# Altium PCB hexbot_LED.PcbDoc
Units mil, origin at the board's own origin, x right, y up, seen from the top; angles counter-clockwise.
Board outline 3150.15 x 2730 mil, 2 copper layers (Top Layer, Bottom Layer); 27 components, 22 nets, 102 pads, 15 vias.
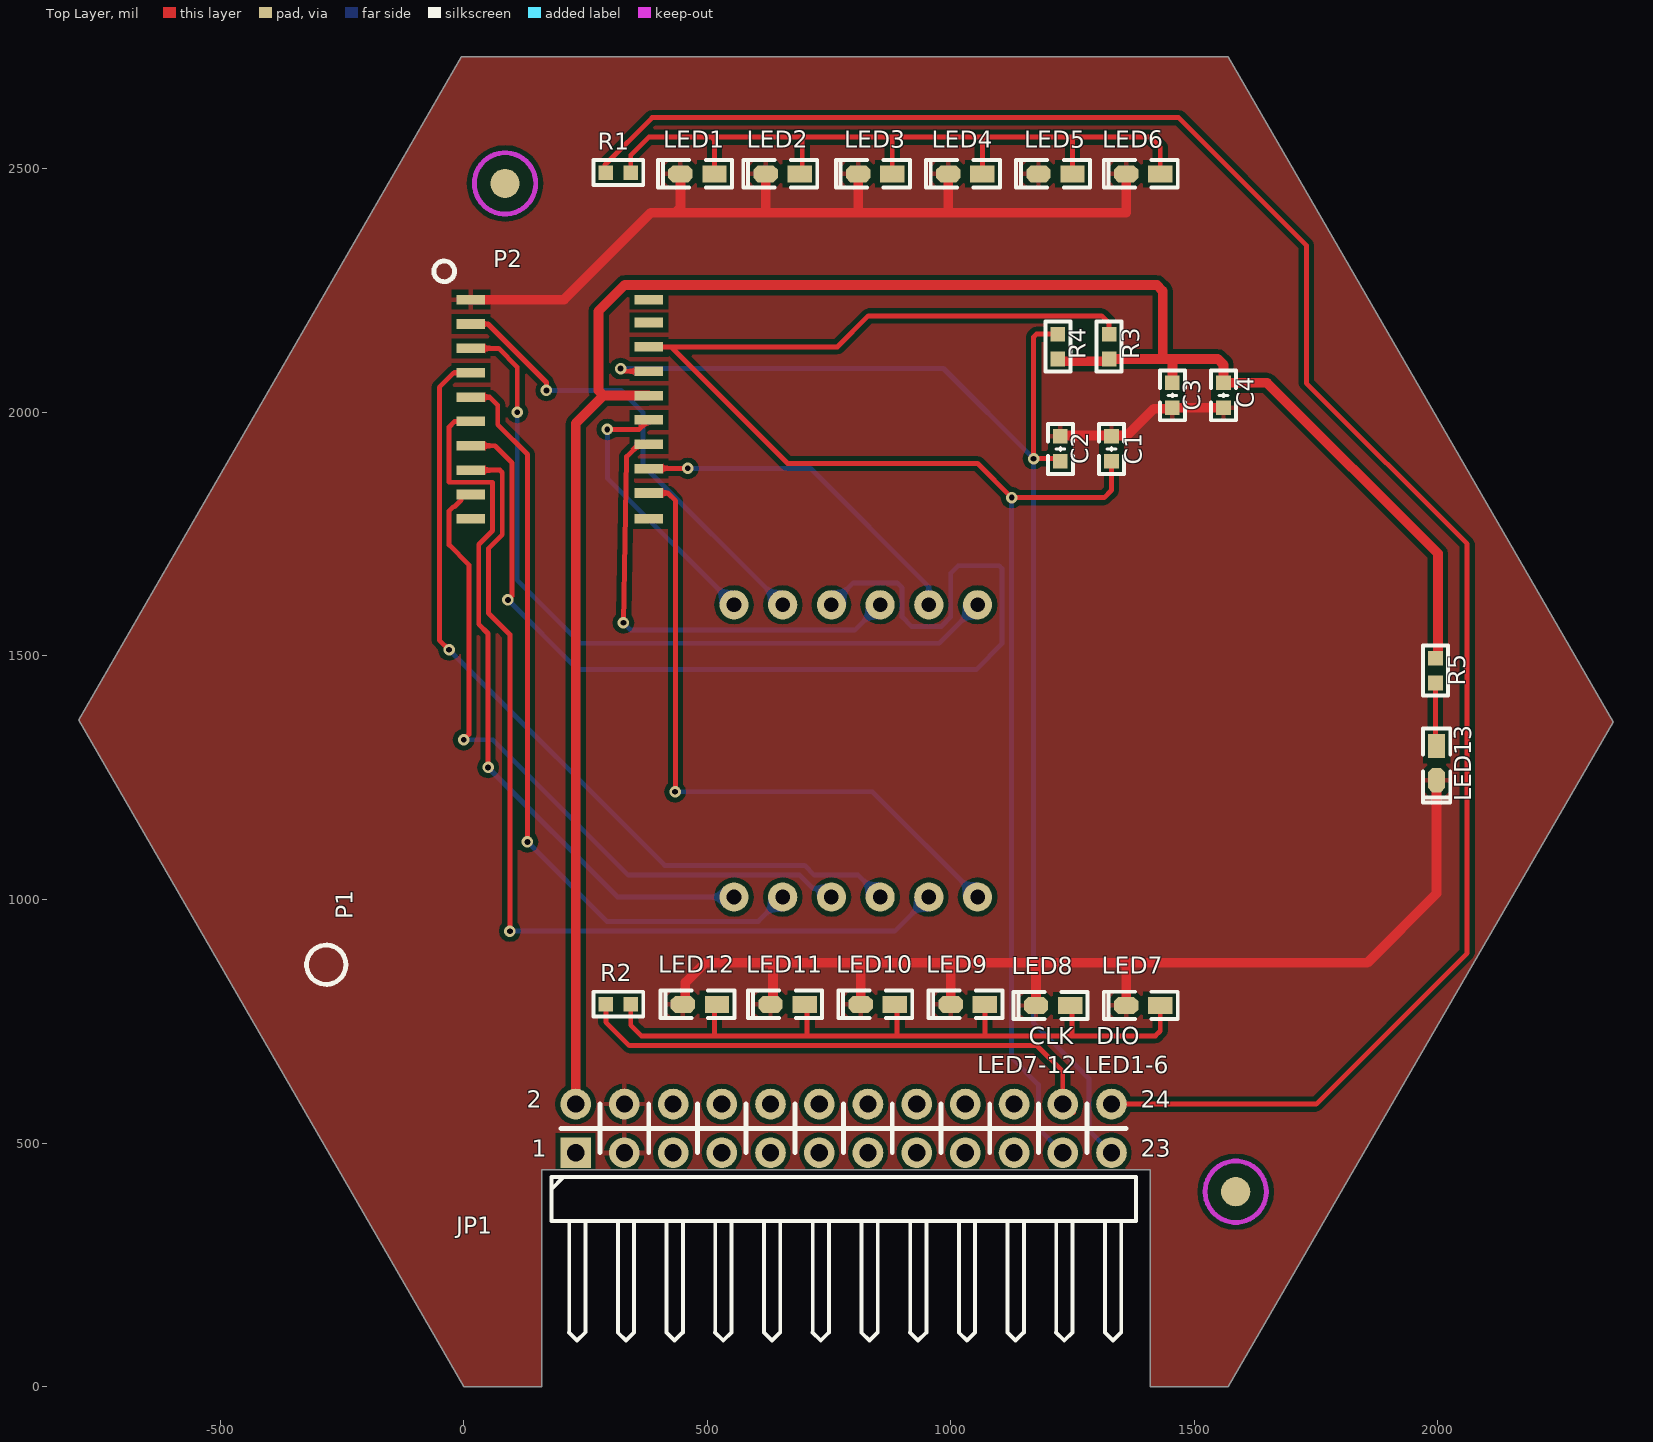
[diagram p0: Top Layer view]
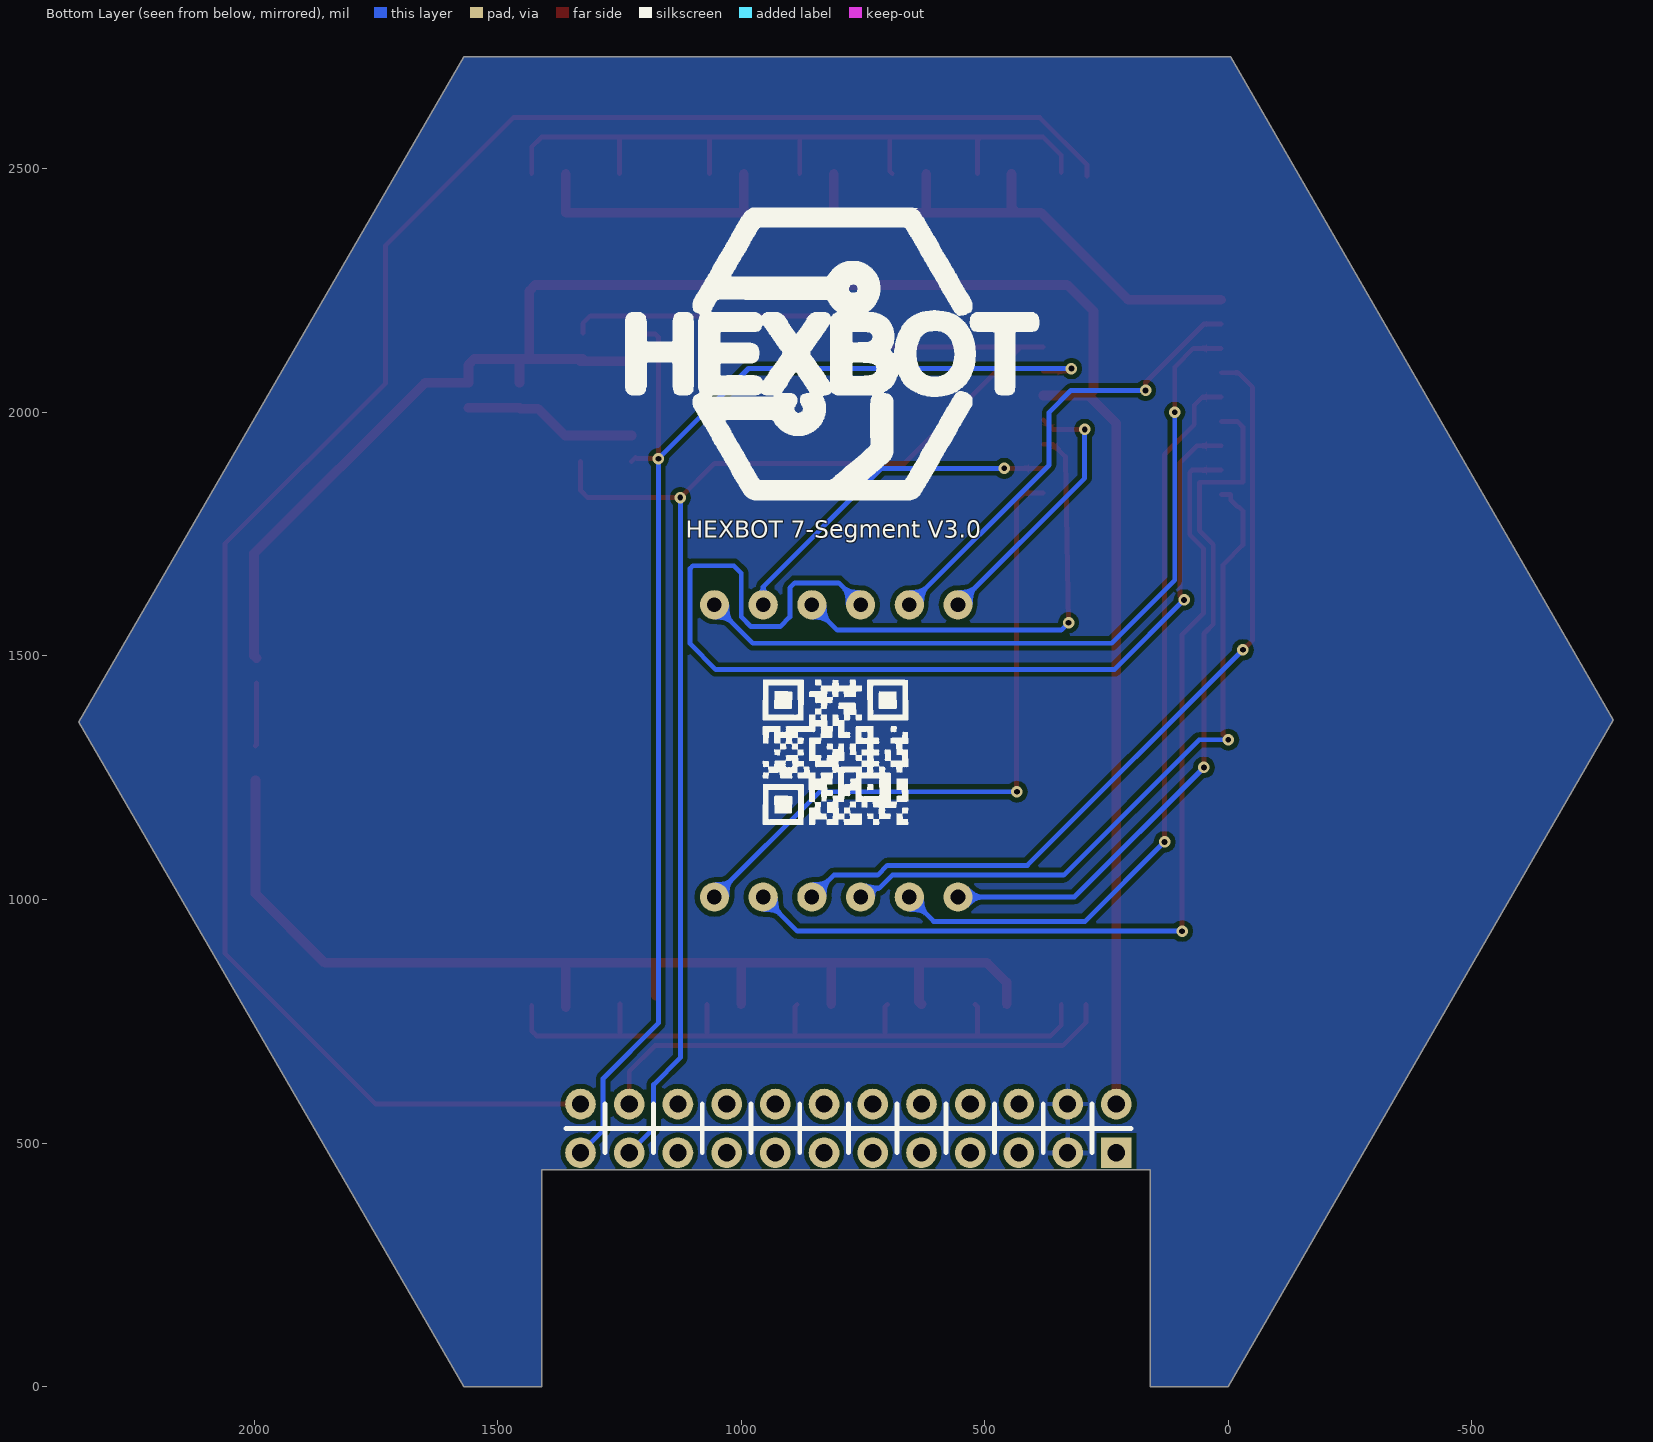
[diagram p1: Bottom Layer view, seen from below]

## Layer stack, top to bottom
Top Solder: solder mask 0.4, Solder Resist, Dk 3.5
Top Layer: signal copper 1.4
Dielectric 1: dielectric 12.6, FR-4, Dk 4.8
Bottom Layer: signal copper 1.4
Bottom Solder: solder mask 0.4, Solder Resist, Dk 3.5

## Board outline
0,0 -790.15,1368.69 -4.71,2730 1570,2730 2360,1364.61 1570,0 1410,0 1410,444.64 160,444.64 160,0

## Design rules (kind name [scope] priority, off if disabled: settings)
Clearance [All] p1: gap=10 ignorepadtopadclearanceinfootprint=FALSE except(0: Arc-Hole Track-Hole SMDPad-Hole THPad-Hole Via-Hole Fill-Hole Poly-Hole Region-Hole Text-Hole)
ComponentClearance [All] p1: gap=0 collisioncheckmode=3 verticalgap=10 showdistances=FALSE
HoleToHoleClearance [All] p1: gap=0 allowstackedmicrovias=TRUE
MinimumSolderMaskSliver [All] p1: minsoldermaskwidth=0
PolygonConnect [All] p1: connectstyle=Relief reliefconductorwidth=10 reliefentries=4 polygonreliefangle="90 Angle" airgapwidth=10
RoomDefinition hexbot_LED [InComponentClass('hexbot_LED')] p1: confinementstyle=ConfineIn formatcopy=TRUE lockcomponents=FALSE outline -3150,-1760 -1150,-1760 -1150,-760 -3150,-760
RoutingVias [All] p1: holewidth=28 width=50 viastyle="Through Hole" minholewidth=28 minwidth=50 maxholewidth=28 maxwidth=50
SilkToSilkClearance [All] p1: silktosilkclearance=0
SilkToSolderMaskClearance [IsPad] p1: minsilkscreentomaskgap=0 clearancetoexposedcopper=TRUE
SolderMaskExpansion [All] p1: expansion=4 istentingtop=FALSE
Width VCC/GND [InNetClass('VCC/GND')] p1: maxlimit=20 minlimit=20 preferedwidth=20 minimp=50.000000 maximp=50.000000 favimp=50.000000
Width [All] p2: maxlimit=20 minlimit=10 preferedwidth=10
25 further rules are at their usual default settings.

## Classes and differential pairs
component class hexbot_LED: C1 C2 C3 C4 JP1 LED1 LED2 LED3 LED4 LED5 LED6 LED7 LED8 LED9 LED10 LED11 LED12 LED13 P2 R1 R2 R3 R4 R5

## Components (designator, comment, footprint, x,y, rotation, side; value= is the part's Value field where it differs from the comment)
C1 "100pF" "C 0603_L" 1330,1925 r270 top
C2 "100pF" "C 0603_L" 1225,1925 r270 top
C3 "10uF" "C 0603_L" 1455,2035 r90 top
C4 "0.1uF" "C 0603_L" 1560,2035 r90 top
JP1 "Header 2X11" HDR2.54-WI-2x12P 780,530 r0 top
LED1 "红色" "LED 0603R" 1395,2490 r180 top
LED2 "红色" "LED 0603R" 1215,2490 r180 top
LED3 "红色" "LED 0603R" 1030,2490 r180 top
LED4 "红色" "LED 0603R" 845,2490 r180 top
LED5 "红色" "LED 0603R" 655,2490 r180 top
LED6 "红色" "LED 0603R" 480,2490 r180 top
LED7 "红色" "LED 0603R" 1395,782.85 r180 top
LED8 "红色" "LED 0603R" 1210,782.59 r180 top
LED9 "红色" "LED 0603R" 1035,785 r180 top
LED10 "红色" "LED 0603R" 850,785 r180 top
LED11 "红色" "LED 0603R" 665,785 r180 top
LED12 "红色" "LED 0603R" 485,785 r180 top
LED13 "红色" "LED 0603R" 1997.15,1280 r270 top
MARK1 "Mark" Mark 1585,400 r90 top
MARK2 "Mark" Mark 85,2470 r90 top
P1 "数码管" 数码管 -187.13,930.98 r0 top
P2 "TM1637" TM1637封装 -5,1754.39 r0 top
R1 "1K" "R 0603_L" 317.44,2492.15 r180 top
R2 "1K" "R 0603_L" 317.44,785 r180 top
R3 "10K" "R 0603_L" 1325,2135 r270 top
R4 "10K" "R 0603_L" 1220,2135 r270 top
R5 "1K" "R 0603_L" 1995,1470 r90 top

## Footprints (in the part's own frame and the unit in brackets; to place one, negate y for a bottom-side part, rotate by r counter-clockwise, add the part's x,y. Pads: shape width x height; smd on the part's side, far side on the other; paste and mask are expansions set on the pad)
"C 0603_L" [mil] "无极性贴片电容                                       淘宝ID:黄晶宝石"
  rect 30x30 smd: 1(-25.59,0) 2(25.59,0)
  silkscreen extent -51,-26 51,26, body extent -31,-16 31,16, height 32
HDR2.54-WI-2x12P [mm] "双排弯脚排针，12x2脚  淘宝ID:黄晶宝石   店铺网址:https://shop463601444.taobao.com"
  rect 1.6x1.6 hole 0.9: 1(-13.97,-1.27)
  round 1.6 hole 0.9: 2(-13.97,1.27) 3(-11.43,-1.27) 4(-11.43,1.27) 5(-8.89,-1.27) 6(-8.89,1.27) 7(-6.35,-1.27) 8(-6.35,1.27) 9(-3.81,-1.27) 10(-3.81,1.27) 11(-1.27,-1.27) 12(-1.27,1.27) 13(1.27,-1.27) 14(1.27,1.27) 15(3.81,-1.27) 16(3.81,1.27) 17(6.35,-1.27) 18(6.35,1.27) 19(8.89,-1.27) 20(8.89,1.27) 21(11.43,-1.27) 22(11.43,1.27) 23(13.97,-1.27) 24(13.97,1.27)
  silkscreen extent -15.24,-11.06 15.24,1.27, body extent -15.24,-11.23 15.24,1.62, height 5.1
"LED 0603R" [mil] "红色0603LED                                           淘宝ID:黄晶宝石"
  rect 50x35 smd: 1(-35,0.26)
  oct 50x35 smd: 2(35,0.26)
  silkscreen extent -71,-28 81,28, body extent -31,-16 31,16, height 18
Mark [mil]
  round 60 smd mask+39.37: mark(0,0)
  Top Layer keep-out circle w10: c0,0 r62.99
"R 0603_L" [mil] "1/10W贴片电阻                 淘宝ID:黄晶宝石"
  rect 30x30 smd: 1(-25.59,0) 2(25.59,0)
  silkscreen extent -51,-26 51,26, body extent -31,-16 32,16, height 16
TM1637封装 [mm]
  rect 1.5x0.5 smd: 1(0.5,12.115) 2(0.5,10.845) 3(0.5,9.575) 4(0.5,8.305) 5(0.5,7.035) 6(0.5,5.765) 7(0.5,4.495) 8(0.5,3.225) 9(0.5,1.955) 10(0.5,0.685) 11(9.779,12.115) 12(9.779,10.922) 13(9.779,9.652) 14(9.779,8.382) 15(9.779,7.112) 16(9.779,5.842) 17(9.779,4.572) 18(9.779,3.302) 19(9.779,2.032) 20(9.779,0.685)
  silkscreen extent -1.43,13.05 -0.35,14.13, body extent 0,0 10.29,12.83, height 0.25
数码管 [mil]
  round 60 hole 30: 1(742.13,74.02) 2(842.13,74.02) 3(942.13,74.02) 4(1042.13,74.02) 5(1142.13,74.02) 6(1242.13,74.02) 7(742.13,674.02) 8(842.13,674.02) 9(942.13,674.02) 10(1042.13,674.02) 11(1142.13,674.02) 12(1242.13,674.02)
  silkscreen extent -135,-105 -55,-25, body extent 0,0 1985,750, height 10

## Part data
C1 C2 C3 C4: library part C, "贴片电容", BOM名称=无极性贴片电容, 唯一出售店铺网址=https://shop463601444.taobao.com, 淘宝ID="封装库来自淘宝 ID：黄晶宝石", 联系售后，技术支持=https://shop463601444.taobao.com
JP1: library part "Header 12X2", "12*2P接插件", BOM名称=12*2P接插件, 学习资源=https://shop463601444.taobao.com, 版权归属="封装库来自淘宝卖家 ID：黄晶宝石"
LED1 LED2 LED3 LED4 LED5 LED6 LED7 LED8 LED9 LED10 LED11 LED12 LED13: library part LED-SMD, "贴片LED", BOM名称=贴片LED, 学习资源=https://shop463601444.taobao.com, 版权归属="封装库来自淘宝 ID：黄晶宝石"
P1: library part "Header 6X2A", "Header, 6-Pin, Dual row", LatestRevisionDate=17-Jul-2002, LatestRevisionNote="Re-released for DXP Platform.", Publisher="Altium Limited"
P2: library part "Header 10X2A", "Header, 10-Pin, Dual row", LatestRevisionDate=17-Jul-2002, LatestRevisionNote="Re-released for DXP Platform.", Publisher="Altium Limited"
R1 R2 R3 R4 R5: library part R, "贴片电阻", BOM名称=贴片电阻, 封装库来自淘宝卖家 ID：黄晶宝石=其他店铺购入均为盗版，不享受售后技术支持服务，请立即申请退款, 版权归属="来自淘宝 ID：黄晶宝石", 联系售后=https://shop463601444.taobao.com

## Via types
v1: diameter 23.62, hole 11.81, Top Layer to Bottom Layer, tented both sides, 15 vias

## Nets (pads, with @x,y where several pads share a name; then routed paths per layer and width w, separated by ;. In a path a pad name is that pad's centre, name@x,y a point inside that pad or via, vN(x,y) a via of type N, cw(c..) or ccw(c..) an arc to the next point about the centre after c; other vN are vias at no path point)
1: JP1.24 R1.2 | length 4103.7
  Top Layer w10: R1.2@289.88,2485 289.88,2507.88 387,2605 1468,2605 1730,2343 1730,2060 2060,1730 2060,890 1750,580 JP1.24@1352.32,580 ; JP1.24@1352.32,580 1335,597.32 1335,585 JP1.24 JP1.24@1352.32,580
2: JP1.22 R2.2 | length 1134.9
  Top Layer w10: R2.2 291.85,748.15 340,700 1177,700 1230,647 JP1.22@1230,590 ; JP1.22@1225,590 JP1.22@1230,585 ; JP1.22 JP1.22@1230,585 ; JP1.22@1252.32,580 1252.32,562.68 JP1.22@1230,585
3V3: JP1.1
5V: C3.2 C4.2 JP1.2 P2.15 R3.2 R4.2 R5.2 | length 4312.8
  Top Layer w20: JP1.2 230,1977.04 287.36,2034.39 ; P2.15 287.36,2034.39 ; R4.2 1224.41,2105 R3.2@1330,2105 ; R3.2 1435,2109.41 ; C3.2 1455,2109.41 ; R5.2 2000,1500.58 2000,1710 1649.41,2060.59 C4.2 1560,2097.7 1548.29,2109.41 1455,2109.41 ; 287.36,2034.39 277,2044.75 277,2207.73 330.47,2261.21 1423.28,2261.21 1435,2249.49 1435,2109.41 ; 1435,2109.41 1455,2109.41
A: P1.8 P2.2 | length 951.9
  Top Layer w10: P2.2 50,2181.36 170,2061.36 v1(170,2045)
  Bottom Layer w10: v1(170,2045) 323,2045 368,2000 368,1892 P1.8
A1: P1.7 P2.16 | length 560.7
  Top Layer w10: v1(295,1965) 360.61,1965 P2.16
  Bottom Layer w10: v1(295,1965) 295,1865 P1.7
A2: P1.10 P2.17 | length 951.7
  Top Layer w10: v1(328,1568) 334.44,1904.97 334.52,1909.06 360.34,1934.39 P2.17
  Bottom Layer w10: v1(328,1568) 343,1553 803,1553 P1.10
A3: P1.11 P2.18 | length 712.9
  Top Layer w10: P2.18 380.61,1885 v1(460,1885)
  Bottom Layer w10: v1(460,1885) 712,1885 955,1642 P1.11
A4: P1.6 P2.19 | length 1369.9
  Top Layer w10: P2.19 419,1834.39 435,1818.39 435,1222 v1(434,1221)
  Bottom Layer w10: v1(434,1221) 839,1221 P1.6
B: P1.12 P2.3 | length 1580.1
  Top Layer w10: P2.3 71.64,2131.36 110,2093 v1(110,2000)
  Bottom Layer w10: v1(110,2000) 110,1655.45 239.45,1526 976,1526 P1.12
C: P1.4 P2.4 | length 1719.4
  Top Layer w10: v1(-30,1512.42) -49.84,1532.26 -49.84,2051.52 -20,2081.36 P2.4
  Bottom Layer w10: v1(-30,1512.42) 412.42,1070 700,1070 720,1050 810,1050 P1.4
CLK: C1.2 JP1.21 P2.13 R3.1 | length 3484.7
  Top Layer w10: P2.13 425.61,2134.39 ; R3.1@1325,2162.56 1325,2183 1310,2198 831,2198 767.39,2134.39 425.61,2134.39 ; C1.2 1330,1840 1315,1825 v1(1125,1825) 1055,1895 665,1895 425.61,2134.39
  Bottom Layer w10: v1(1125,1825) 1125,675 1180,620 1180,530 JP1.21
D: P1.2 P2.5 | length 1596.5
  Top Layer w10: P2.5 53.64,2031.36 70,2015 70,1974.61 131,1913.61 v1(131,1118.13)
  Bottom Layer w10: v1(131,1118.13) 294.13,955 605,955 P1.2
DIO: C2.2 JP1.23 P2.14 R4.1 | length 2845.7
  Top Layer w10: v1(322,2090) 327.61,2084.39 P2.14 ; R4.1@1214.4,2155 R4.1 1175.86,2160.59 1170,2154.74 v1(1170,1905) 1214.41,1905 1216.91,1907.5 C2.2
  Bottom Layer w10: v1(322,2090) 985,2090 v1(1170,1905) 1170,746.04 1283.5,632.54 1283.5,526.5 JP1.23
DP: P1.3 P2.9 | length 1456.4
  Top Layer w10: v1(0,1328) 10.87,1338.87 10.87,1687.13 -29.84,1727.84 -29.84,1797.75 -21.39,1806.21 -18.79,1806.21 -5,1820 ; P2.9 P2.9@-5,1831.36 ; -5,1820 P2.9@-5,1831.36 ; -5,1820 P2.9@-5,1831.36
  Bottom Layer w10: v1(0,1328) 60,1328 338,1050 690,1050 717,1023 737,1023 P1.3
E: P1.1 P2.6 | length 1472.1
  Top Layer w10: P2.6 -18.48,1981.36 -29.84,1970 -29.84,1856.52 59.22,1856.52 59.22,1757 30.87,1728.66 30.87,1565.13 50,1546 v1(50,1271)
  Bottom Layer w10: v1(50,1271) 316,1005 P1.1
F: P1.9 P2.7 | length 2181.2
  Top Layer w10: P2.7 64.37,1931.36 99.22,1896.52 99.22,1623.22 v1(91,1615)
  Bottom Layer w10: v1(91,1615) 234,1472 1052,1472 1105,1525 1105,1679.14 1099.14,1685 1015,1685 1000,1670 1000,1580 980,1560 920,1560 900,1580 900,1640 890,1650 800,1650 P1.9
G: P1.5 P2.8 | length 1927.1
  Top Layer w10: P2.8 74.37,1881.36 79.22,1876.52 79.22,1748.71 50.87,1720.37 50.87,1588.13 95,1544 v1(95,935)
  Bottom Layer w10: v1(95,935) 885,935 P1.5
GND: C1.1 C2.1 C3.1 C4.1 JP1.3 JP1.4 LED1.2 LED2.2 LED3.2 LED4.2 LED5.2 LED6.2 LED7.2 LED8.2 LED9.2 LED10.2 LED11.2 LED12.2 LED13.2 P2.1 | length 4495.6
  Top Layer w20: P2.1 205.81,2231.36 384.44,2410 435,2410 ; LED6.2 445,2420 435,2410 ; LED12.2@455,784.75 455,830 495,870 635,870 ; LED5.2 620,2415 625,2410 ; LED11.2 635,789.75 635,870 ; LED4.2 810,2410 ; LED10.2 815,870 ; LED3.2 995,2410 ; LED9.2 1000,870 ; 1175,802.29 1175,870 ; C2.1@1225,1952.56 1362,1952.56 1416.88,2007.44 1453.04,2007.44 C3.1 C4.1 ; LED7.2@1360,778.52 1360,870 ; LED1.2 1360,2410 995,2410 ; LED13.2 1997.41,1012.41 1855,870 1360,870 ; 435,2410 625,2410 ; 625,2410 810,2410 ; 635,870 815,870 ; 810,2410 995,2410 ; 815,870 1000,870 ; 1000,870 1175,870 ; 1175,870 1360,870
NetLED1_1: LED1.1 LED2.1 LED3.1 LED4.1 LED5.1 LED6.1 R1.1 | length 1584.6
  Top Layer w10: R1.1 343.04,2528.04 380,2565 509.14,2565 ; LED6.1 515,2559.14 509.14,2565 ; LED5.1 695,2494.75 695,2565 ; LED4.1 880,2565 ; LED3.1 1065,2560 1070,2565 ; LED2.1 1250,2565 ; LED1.1 1430,2545 1410,2565 1250,2565 ; 509.14,2565 695,2565 ; 695,2565 880,2565 ; 880,2565 1070,2565 ; 1070,2565 1250,2565
NetLED7_1: LED7.1 LED8.1 LED9.1 LED10.1 LED11.1 LED12.1 R2.1 | length 1526.9
  Top Layer w10: R2.1 343.04,741.96 365,720 515,720 ; LED12.1 515,779.75 515,720 ; LED11.1 705,779.74 705,720 ; LED10.1 890,779.74 890,720 ; LED9.1 1070,720 ; LED8.1@1248.92,785.9 1248.92,720 ; LED7.1 1430,730 1420,720 1294.09,720 1289.14,720 1248.92,720 ; 515,720 705,720 ; 705,720 890,720 ; 890,720 1070,720 ; 1070,720 1248.92,720
NetLED13_1: LED13.1 R5.1 | length 130.4
  Top Layer w10: R5.1 1995,1317.4 LED13.1
pads on no net: JP1.5 JP1.6 JP1.7 JP1.8 JP1.9 JP1.10 JP1.11 JP1.12 JP1.13 JP1.14 JP1.15 JP1.16 JP1.17 JP1.18 JP1.19 JP1.20 MARK1.mark MARK2.mark P2.10 P2.11 P2.12 P2.20

## Polygon pours and split planes (outlines as drawn)
GND on Top Layer "Top Layer-No Net" (solid, remove dead copper, pour order 2): 0,0 -790.15,1368.69 -4.71,2730 1570,2730 2360,1364.61 1570,0 1410,0 1410,444.64 160,444.64 160,0
GND on Bottom Layer "Top Layer-No Net1" (solid, pour order 3): 0,0 -790.15,1368.69 -4.71,2730 1570,2730 2360,1364.61 1570,0 1410,0 1410,444.64 160,444.64 160,0

## Silkscreen, mask and mechanical layers (free items; w line width, h text height)
Top Overlay:
  text "CLK   DIO" at 1160.36,690.78 h60
  text "LED7-12 LED1-6" at 1053.99,631.05 h60
Bottom Overlay:
  drawing of 2418 lines, arcs and shapes, not listed
  text "HEXBOT 7-Segment V3.0" at 1113.62,1730.25 h60
Mechanical 1:
  the board outline again, w10

## Text inside footprints (layer, text, board x,y; h text height)
JP1: Top Overlay "1" at 140,460 h60; Top Overlay "2" at 130,560 h60; Top Overlay "23" at 1390,460 h60; Top Overlay "24" at 1390,560 h60